# EAGLE board RangeFinder (EAGLE 9.6.2)
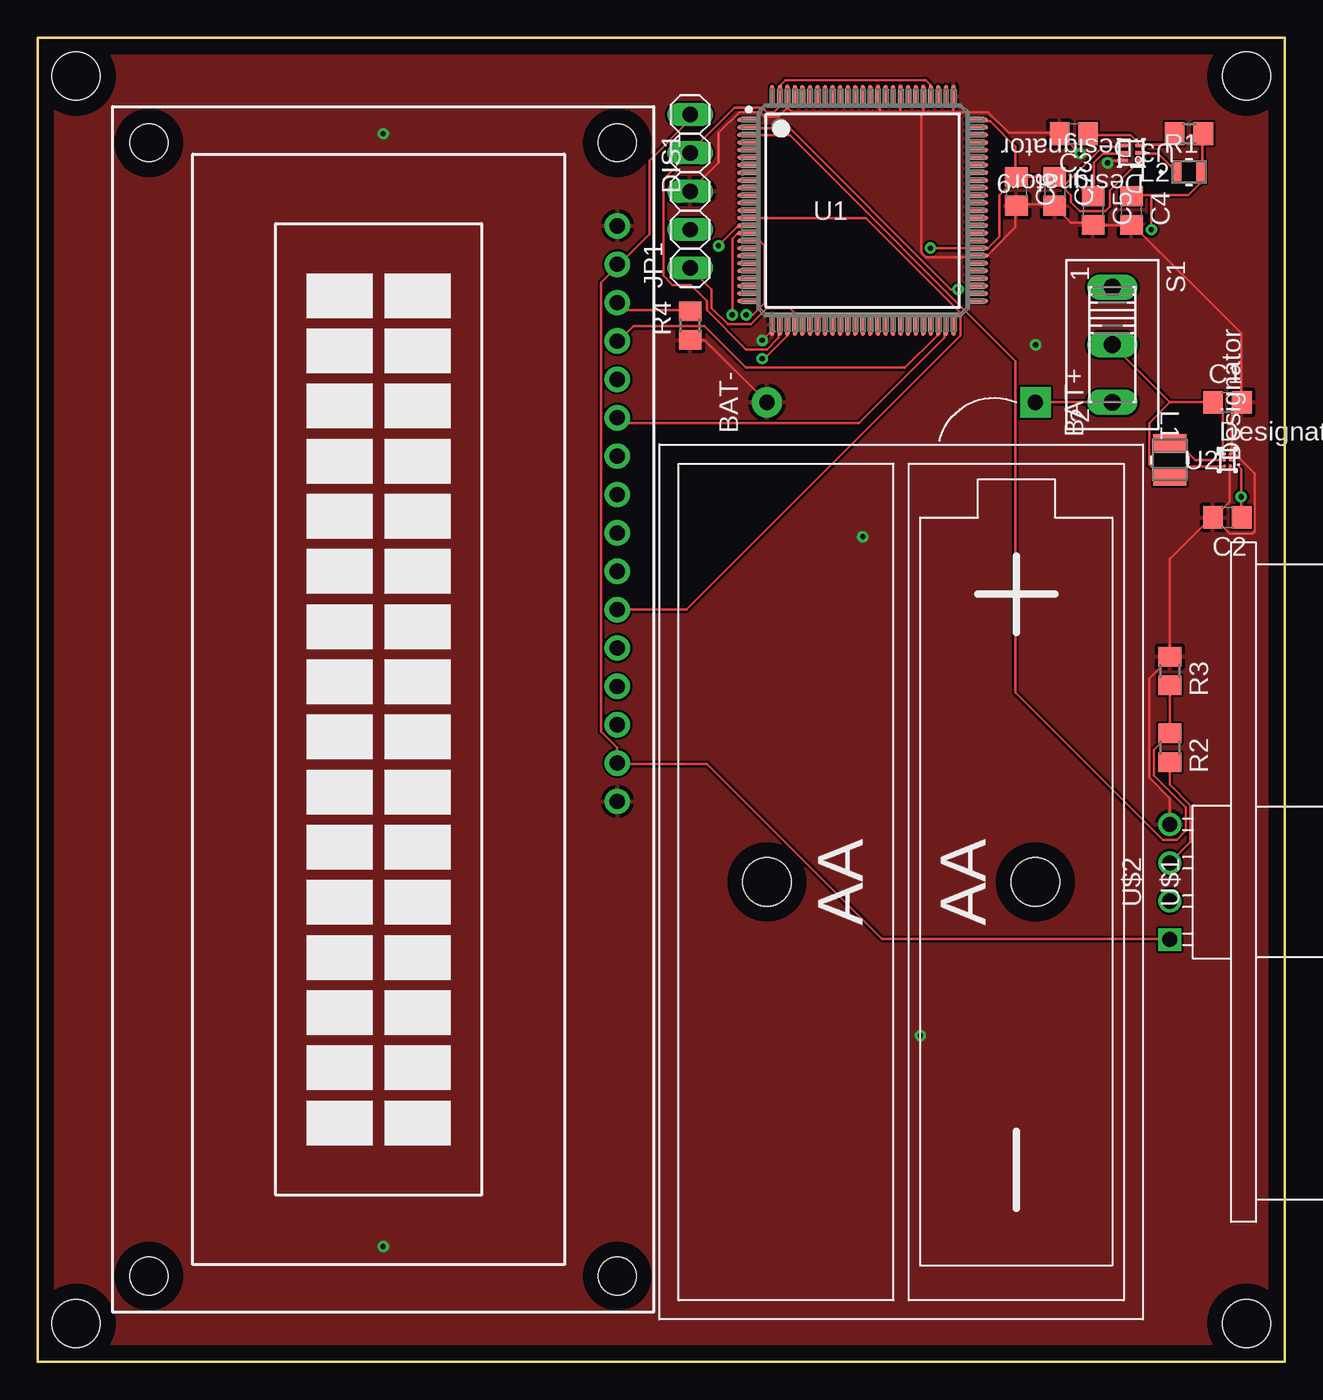
[diagram p0: board, top side]
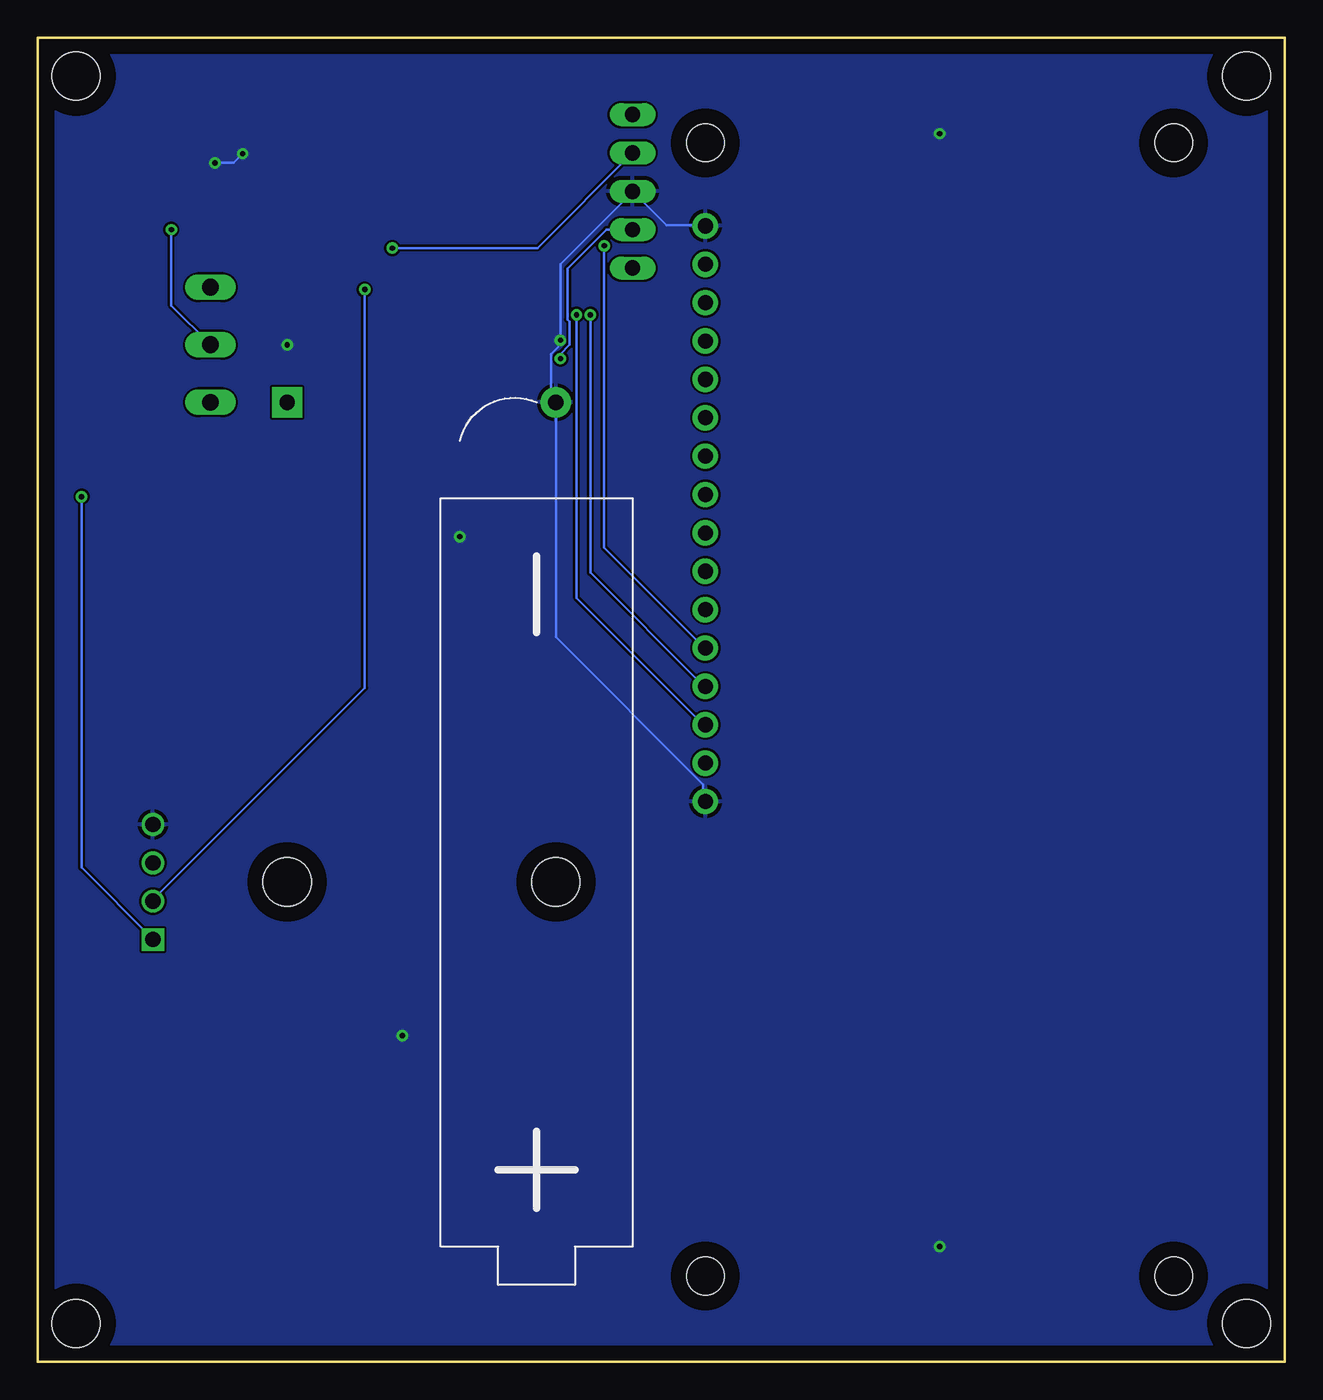
[diagram p1: board, bottom side, seen from below]

Size 82.55 x 87.63 mm. Coordinates in mm from the lower left corner, seen from the top.
Outline: 0,0 0,87.63 82.55,87.63 82.55,0 0,0
Copper layers (1*16): Top 0.035mm / dielectric 1.5mm / Bottom 0.035mm
Design rules "default": minimum track width 6mil, minimum drill 0.35mm, track to track 6mil, track to pad 6mil, pad to pad 6mil, via to via 6mil, smd to smd 6mil, copper to edge 40mil, drill to drill 6mil, minimum pad ring 10mil, minimum via ring 8mil, stop-mask expansion 4mil, vias tented up to drill 0mil, thermal gap 10mil
Holes 3.17 mm at 2.54,85.09 2.54,2.54 80.01,2.54 80.01,85.09

## Footprints (pad centres in the part's own frame; a part is rotated, then mirrored left to right if it is on the bottom)
C0805 = smd 1.3 x 1.5: 1 -0.95,0; 2 0.95,0
TUXGR_16X2_R2 = drill 1 pad 1.676: 1 -32,15.5; 2 -29.46,15.5; 3 -26.92,15.5; 4 -24.38,15.5; 5 -21.84,15.5; 6 -19.3,15.5; 7 -16.76,15.5; 8 -14.22,15.5; 9 -11.68,15.5; 10 -9.14,15.5; 11 -6.6,15.5; 12 -4.06,15.5; 13 -1.52,15.5; 14 1.02,15.5; 15 3.56,15.5; 16 6.1,15.5 | hole 2.5: -37.5,-15.5; 37.5,-15.5; -37.5,15.5; 37.5,15.5
1X05 = drill 1.016 long: 1 -5.08,0; 2 -2.54,0; 3 0,0; 4 2.54,0; 5 5.08,0
IND_LQM2HPN2R2MG0L_MUR = smd 1.168 x 2.21: 1 -1.118,0; 2 1.118,0
IND_TAIYO_CBC2012_TAY = smd 0.61 x 1.448: 1 -0.8,0; 2 0.8,0
R0805 = smd 1.3 x 1.5: 1 -0.95,0; 2 0.95,0
255SB = drill 1.118 long: 1 -3.81,0; 2 0,0; 3 3.81,0
PZ0100A_L = smd 1.5 x 0.25: 1 -7.55,6; 2 -7.55,5.5; 3 -7.55,5; 4 -7.55,4.5; 5 -7.55,4; 6 -7.55,3.5; 7 -7.55,3; 8 -7.55,2.5; 9 -7.55,2; 10 -7.55,1.5; 11 -7.55,1; 12 -7.55,0.5; 13 -7.55,0; 14 -7.55,-0.5; 15 -7.55,-1; 16 -7.55,-1.5; 17 -7.55,-2; 18 -7.55,-2.5; 19 -7.55,-3; 20 -7.55,-3.5; 21 -7.55,-4; 22 -7.55,-4.5; 23 -7.55,-5; 24 -7.55,-5.5; 25 -7.55,-6; 51 7.55,-6; 52 7.55,-5.5; 53 7.55,-5; 54 7.55,-4.5; 55 7.55,-4; 56 7.55,-3.5; 57 7.55,-3; 58 7.55,-2.5; 59 7.55,-2; 60 7.55,-1.5; 61 7.55,-1; 62 7.55,-0.5; 63 7.55,0; 64 7.55,0.5; 65 7.55,1; 66 7.55,1.5; 67 7.55,2; 68 7.55,2.5; 69 7.55,3; 70 7.55,3.5; 71 7.55,4; 72 7.55,4.5; 73 7.55,5; 74 7.55,5.5; 75 7.55,6 | smd 0.25 x 1.5: 26 -6,-7.55; 27 -5.5,-7.55; 28 -5,-7.55; 29 -4.5,-7.55; 30 -4,-7.55; 31 -3.5,-7.55; 32 -3,-7.55; 33 -2.5,-7.55; 34 -2,-7.55; 35 -1.5,-7.55; 36 -1,-7.55; 37 -0.5,-7.55; 38 0,-7.55; 39 0.5,-7.55; 40 1,-7.55; 41 1.5,-7.55; 42 2,-7.55; 43 2.5,-7.55; 44 3,-7.55; 45 3.5,-7.55; 46 4,-7.55; 47 4.5,-7.55; 48 5,-7.55; 49 5.5,-7.55; 50 6,-7.55; 76 6,7.55; 77 5.5,7.55; 78 5,7.55; 79 4.5,7.55; 80 4,7.55; 81 3.5,7.55; 82 3,7.55; 83 2.5,7.55; 84 2,7.55; 85 1.5,7.55; 86 1,7.55; 87 0.5,7.55; 88 0,7.55; 89 -0.5,7.55; 90 -1,7.55; 91 -1.5,7.55; 92 -2,7.55; 93 -2.5,7.55; 94 -3,7.55; 95 -3.5,7.55; 96 -4,7.55; 97 -4.5,7.55; 98 -5,7.55; 99 -5.5,7.55; 100 -6,7.55
YFF0006AFAD = smd 0.23 x 0.23: 1 -0.2,0.4; 2 0.2,0.4; 3 -0.2,0; 4 0.2,0; 5 -0.2,-0.4; 6 0.2,-0.4
DSE0006A = smd 0.66 x 0.25: 1 -0.62,0.5 | smd 0.7 x 0.25: 2 -0.6,0; 3 -0.6,-0.5; 4 0.6,-0.5; 5 0.6,0; 6 0.6,0.5
BATTERY-HOLDER-2AA = drill 1 pad 2 square: BAT+ -31.75,8.89 | drill 1 pad 2: BAT- -31.75,-8.89 | hole 3.2: 0,8.89; 0,-8.89
ULTRASONIC-HC-SR04#V = drill 1 square: 1 -3.81,0 | drill 1: 2 -1.27,0; 3 1.27,0; 4 3.81,0

## Placement (x,y rotation side)
C1  10 uF  [C0805]  78.74,63.5 0 top
C2  10 uF  [C0805]  78.74,55.88 180 top
C3  100 uF  [C0805]  68.58,81.28 180 top
C4  10 uF  [C0805]  72.39,76.2 270 top
C5  1 uF  [C0805]  69.85,76.2 270 top
C6  4.7 uF  [C0805]  64.77,77.47 270 top
C7  4.7 uF  [C0805]  67.31,77.47 270 top
DIS1  TUXGR_16X2_R2  [TUXGR_16X2_R2]  22.86,43.18 270 top
JP1  [1X05]  43.18,77.47 90 top
L1  LQM2HPN2R2MG0L  [IND_LQM2HPN2R2MG0L_MUR]  74.93,59.69 270 top
L2  CBC2012T2R2M  [IND_TAIYO_CBC2012_TAY]  76.2,78.74 0 top
R1  390 mOhm  [R0805]  76.2,81.28 180 top
R2  1 KOhm  [R0805]  74.93,40.64 270 top
R3  2 KOhm  [R0805]  74.93,45.72 270 top
R4  3.5 KOhm  [R0805]  43.18,68.58 90 top
S1  [255SB]  71.12,67.31 270 top
U1  Value  [PZ0100A_L]  54.61,76.2 0 top
U2  Value  [YFF0006AFAD]  78.74,59.69 0 top
U3  Value  [DSE0006A]  72.39,80.01 180 top
U$1  BATTERY-HOLDER-2AA  [BATTERY-HOLDER-2AA]  57.15,31.75 270 top
U$2  ULTRASONIC-HC-SR04#V  [ULTRASONIC-HC-SR04#V]  74.93,31.75 90 top

## Library data of the parts
C1 C2 C4 C6 C7 = rcl; MF: TAIYO YUDEN; MPN: TMK212BBJ106MG-T; OC_NEWARK: 08AH2212; SPICEPREFIX: C
C3 = rcl; MF: TAIYO YUDEN; MPN: PMK212BBJ107MG-T.; OC_NEWARK: 29AC9540; SPICEPREFIX: C
C5 = rcl; MF: MULTICOMP PRO; MPN: MC0805F105Z500CT; OC_NEWARK: 06R3936; SPICEPREFIX: C
DIS1 = display-lcd; MF: MIDAS; MPN: MC21605C6W-BNMLW-V2; OC_FARNELL: unknown; OC_NEWARK: 03AC3426
JP1 = pinhead; MF: MULTICOMP PRO; MPN: 2211S-05G; OC_NEWARK: 08N6747
L1 = JD-RangeFinder; BUILT_BY: EMA_Cory; COPYRIGHT: Copyright (C) 2018 Accelerated Designs. All rights reserved; DATASHEET: https://search.murata.co.jp/Ceramy/image/img/P02/JELF243B-0019.pdf; MANUFACTURER_PART_NUMBER: LQM2HPN2R2MG0L; MF: MURATA; MPN: LQM2HPN2R2MG0L; OC_NEWARK: 45Y5436; SOURCELIBRARY: Murata_2020-08-06; VENDOR: Murata
L2 = JD-RangeFinder; BUILT_BY: EMA_UL_Team; MANUFACTURER_PART_NUMBER: CBC2012T2R2M; MF: TAIYO YUDEN; MPN: CBC2012T2R2M.; OC_NEWARK: 29AC3034; SOURCELIBRARY: TaiyoYuden_2011-01-01_IND_CB; VENDOR: TAIYO YUDEN
R1 = rcl; MF: PANASONIC; MPN: ERJ-6DQJR39V; OC_NEWARK: 68AC0178; SPICEPREFIX: R
R2 = rcl; MF: MULTICOMP PRO; MPN: MCPWR05FTEW1001; OC_NEWARK: 43T5414; SPICEPREFIX: R
R3 = rcl; MF: PANASONIC; MPN: ERA-6AEB202V; OC_NEWARK: 40P0008; SPICEPREFIX: R
R4 = rcl; MF: TT ELECTRONICS / WELWYN; MPN: PCF0805R-3K57BT1; OC_NEWARK: 50M4615; SPICEPREFIX: R
S1 = switch; MF: E-SWITCH; MPN: EG1218; OC_NEWARK: 15N7301
U1 = JD-RangeFinder; ALTERNATE_PARTNUMBER: MSP430FR6989IPZ; COMPTYPE: IC; MANUFACTURER: Texas Instruments; MF: TEXAS INSTRUMENTS; MOUNTTYPE: SMT; MPN: MSP432P401RIPZR; OC_NEWARK: 28AH4232; PACKAGEREFERENCE: PZ0100A; PARTNUMBER: MSP430FR6989IPZR; PIN_COUNT: 100; REFDES: RefDes; ROHS: Y; TYPE: TYPE
U2 = JD-RangeFinder; MANUFACTURER: Texas Instruments; MANUFACTURER_NAME: Texas Instruments; MANUFACTURER_PART_NUMBER: TPS610997YFFR; OC_NEWARK: unknown; PARTNUMBER: TPS610997YFFR; REFDES: RefDes; TYPE: TYPE
U3 = JD-RangeFinder; ALTERNATEPARTNUMBER: TPS610981DSET; APPLICATION_BUILDNUMBER: *; COMPTYPE: IC; MANUFACTURER: Texas Instruments; MANUFACTURER_NAME: Texas Instruments; MANUFACTURER_PART_NUMBER: TPS610981DSER; MOUNTTYPE: SMT; OC_NEWARK: unknown; PACKAGEREFERENCE: DSE0006A; PARTNUMBER: TPS610981DSER; PIN_COUNT: 6; REFDES: RefDes; ROHS: Y; TYPE: TYPE
U$1 = diy-modules; MF: KEYSTONE; MPN: 2462; OC_NEWARK: 16F1091
U$2 = diy-modules; MF: MCM; MPN: 83-17989; OC_NEWARK: 32AC9980

## Nets
GND: C1.2 C2.2 C3.2 C4.2 C5.2 C6.2 C7.2 DIS1.1 DIS1.16 JP1.3 R3.1 R4.1 U1.26 U1.57 U1.76 U1.80 U1.83 U1.86 U1.98 U2.2 U2.6 U3.6 U$1.BAT- U$2.4
N$1: C3.1 R1.2 U3.3
N$2: S1.3 U$1.BAT+
N$3: C5.1 U3.5
N$4: C1.1 C4.1 L1.2 L2.2 R1.1 S1.2 U2.1 U2.5
N$5: C6.1 C7.1 JP1.4 U1.27 U1.58 U1.75 U1.79 U1.99 U3.1 U3.4
N$6: JP1.1 U1.29
N$7: L2.1 U3.2
N$8: JP1.2 U1.28
N$9: R2.1 R3.2 U1.3
N$10: L1.1 U2.3
N$12: R2.2 U$2.3
N$13: DIS1.3 R4.2
N$14: U1.2 U$2.2
N$15: DIS1.11 U1.14
N$16: DIS1.12 U1.15
N$17: DIS1.13 U1.16
N$18: DIS1.14 U1.17
N$19: DIS1.6 U1.49
N$20: DIS1.4 U1.48
N$21: C2.1 DIS1.2 DIS1.15 JP1.5 U2.4 U$2.1
N$22: DIS1.5

## Tracks (layer width: path | path; a pad name or v marks a point on that pad's centre or on a via)
GND  (via drill 0.35)
  Top 0.152: U$1.BAT- 44.15,67.62 43.23,67.62 R4.1 | v47.95,67.62 48.56,68.22 48.56,68.53 U1.26 | 79.04,60.15 79.04,62.89 79.65,63.5 | 77.83,55.88 78.89,56.95 78.89,59.23 U2.6 | 79.04,60.15 79.2,60.15 80.57,58.78 80.57,54.97 80.42,54.81 78.89,54.81 77.83,55.88 | 79.04,60.15 U2.2 | 77.83,55.88 C2.2 77.67,55.88 74.93,53.14 R3.1 74.93,46.58 73.56,45.21 73.56,38.66 74.93,37.29 U$2.4 | v70.81,79.35 70.97,79.5 71.73,79.5 U3.6 | v68.99,79.96 67.77,81.18 C3.2 67.62,81.33 64.26,81.33 62.89,82.7 60.6,82.7 | 49.63,83.01 49.63,83.62 U1.98 49.63,83.01 | 49.63,83.01 49.02,82.4 48.11,82.4 47.8,82.7 46.43,82.7 45.06,81.33 45.06,79.35 JP1.3 | 55.73,82.7 49.94,82.7 49.63,83.01 | 55.73,82.7 57.1,82.7 | 57.1,82.7 58.47,82.7 | 58.47,82.7 58.62,82.7 | 58.62,82.7 60.6,82.7 | 58.47,82.7 58.47,73.41 58.78,73.1 62.13,73.1 U1.57 62.28,73.25 62.89,73.25 64.72,75.08 64.72,76.45 C6.2 64.87,76.61 67.31,76.61 C7.2 67.31,76.45 68.38,75.39 69.75,75.39 C5.2 69.9,75.23 72.34,75.23 C4.2 72.49,75.23 79.65,68.07 79.65,63.5 | 79.65,63.5 C1.2 | 55.73,82.7 55.73,83.62 U1.86 | 57.1,82.7 57.1,83.62 U1.83 | 58.62,82.7 58.62,83.62 U1.80 | 60.6,82.7 60.6,83.62 U1.76
  Bottom 0.152: DIS1.16 38.51,37.13 38.51,38.2 48.26,47.95 U$1.BAT- 48.56,63.8 48.56,66.7 47.95,67.31 v47.95,67.62 47.95,72.64 43.23,77.37 JP1.3 40.94,75.23 38.51,75.23 DIS1.1 | v70.81,79.35 69.6,79.35 v68.99,79.96
  other vias: 22.86,7.62 22.86,81.28 54.61,54.61 58.42,21.59 66.04,67.31
  pour Top (isolate 0): -6.35,96.52 92.71,96.52 92.71,-10.16 -6.35,-10.16
  pour Bottom (isolate 0): -5.08,95.25 91.44,95.25 91.44,-8.89 -5.08,-8.89
N$1
  Top 0.152: R1.2 75.23,81.18 74.62,80.57 73.1,80.57 U3.3 72.95,80.57 72.34,81.18 69.6,81.18 C3.1
N$2
  Top 0.152: U$1.BAT+ S1.3
N$3
  Top 0.152: U3.5 71.73,79.96 70.51,79.96 69.9,79.35 69.9,77.22 C5.1
N$4  (via drill 0.35)
  Top 0.152: R1.1 77.06,81.18 77.06,78.74 L2.2 76.91,78.74 76.91,77.98 76.15,77.22 73.71,77.22 | 73.71,77.22 72.49,77.22 C4.1 | 74.93,58.62 75.54,58.62 76.15,59.23 78.44,59.23 U2.5 | U2.1 78.44,60.15 78.44,62.89 77.83,63.5 C1.1 74.93,63.5 | S1.2 74.93,63.5 | 74.93,58.62 74.32,58.62 73.56,59.38 73.56,62.13 74.93,63.5 | 74.93,58.62 L1.2 | v73.71,74.93 73.71,77.22
  Bottom 0.152: v73.71,74.93 73.71,69.9 S1.2
N$5  (via drill 0.35)
  Top 0.152: C6.1 64.72,78.28 63.65,77.22 63.65,74.47 62.89,73.71 62.28,73.71 U1.58 62.13,73.71 v59.08,73.71 | 67.77,77.83 67.31,78.28 C7.1 | 67.77,77.83 68.38,77.22 68.38,76.76 68.99,76.15 70.66,76.15 70.97,76.45 70.97,77.52 72.95,79.5 U3.1 | 67.77,77.83 67.92,77.83 70.51,80.42 71.73,80.42 U3.4 | 67.77,77.83 C7.1 | C6.1 64.87,78.44 67.31,78.44 C7.1 | U1.27 49.02,68.53 49.02,67.77 48.26,67.01 46.89,67.01 44.3,69.6 44.3,70.21 43.23,71.27 42.01,71.27 41.4,71.88 41.4,78.28 43.08,79.96 JP1.4 43.23,80.11 46.13,83.01 47.95,83.01 48.26,82.7 48.72,82.7 49.02,83.01 49.02,83.62 U1.99 49.17,83.77 49.17,84.53 49.48,84.84 58.78,84.84 59.08,84.53 59.08,83.77 U1.79 | U1.75 62.28,82.09 63.04,82.09 64.72,80.42 64.72,78.44 C6.1
  Bottom 0.152: v59.08,73.71 49.48,73.71 JP1.4
N$6
  Top 0.152: JP1.1 44.6,70.97 44.6,69.75 45.67,68.68 47.19,68.68 48.26,69.75 49.78,69.75 50.09,69.44 50.09,68.68 U1.29
N$7
  Top 0.152: U3.2 73.1,79.96 74.17,79.96 75.39,78.74 L2.1
N$8  (via drill 0.35)
  Top 0.152: v47.95,66.4 48.11,66.4 49.63,67.92 49.63,68.53 U1.28
  Bottom 0.152: v47.95,66.4 47.95,66.7 47.35,67.31 47.35,68.83 47.5,68.99 47.5,72.34 44.91,74.93 JP1.2
N$9
  Top 0.152: R3.2 R2.1 74.93,41.55 73.86,40.49 73.86,38.81 76,36.68 76,35.15 75.39,34.54 74.47,34.54 64.72,44.3 64.72,66.24 49.78,81.18 47.19,81.18 U1.3
N$10
  Top 0.152: U2.3 78.44,59.69 76.61,59.69 75.54,60.76 74.93,60.76 L1.1
N$12
  Top 0.152: R2.2 74.93,38.2 76.3,36.83 76.3,34.39 U$2.3
N$13
  Top 0.152: R4.2 43.08,69.6 38.96,69.6 38.51,70.05 DIS1.3
N$14  (via drill 0.35)
  Top 0.152: v60.91,70.97 60.45,70.97 49.78,81.64 47.19,81.64 U1.2
  Bottom 0.152: v60.91,70.97 60.91,44.6 74.93,30.58 U$2.2
N$15
  Top 0.152: U1.14 47.19,75.69 54.81,75.69 61.06,69.44 61.06,67.92 42.93,49.78 38.51,49.78 DIS1.11
N$16  (via drill 0.35)
  Top 0.152: v45.06,73.86 46.28,75.08 47.04,75.08 U1.15
  Bottom 0.152: v45.06,73.86 45.06,53.9 38.51,47.35 DIS1.12
N$17  (via drill 0.35)
  Top 0.152: v45.97,69.29 45.97,74.32 46.28,74.62 47.04,74.62 U1.16
  Bottom 0.152: v45.97,69.29 45.97,52.22 38.51,44.76 DIS1.13
N$18  (via drill 0.35)
  Top 0.152: v46.89,69.29 47.35,69.29 48.11,70.05 48.11,73.86 47.8,74.17 47.19,74.17 U1.17
  Bottom 0.152: v46.89,69.29 46.89,50.55 38.51,42.16 DIS1.14
N$19
  Top 0.152: U1.49 60,68.53 60,67.77 54.36,62.13 38.81,62.13 38.51,62.43 DIS1.6
N$20
  Top 0.152: U1.48 59.54,68.53 59.54,67.92 57.4,65.79 46.89,65.79 44.15,68.53 39.42,68.53 38.51,67.62 DIS1.4
N$21  (via drill 0.35)
  Top 0.152: U2.4 79.04,59.69 79.65,59.08 v79.65,57.25 79.65,55.88 C2.1 | JP1.5 43.08,82.55 43.08,82.09 40.49,79.5 40.49,74.62 38.51,72.64 DIS1.2 38.35,72.49 37.29,71.43 37.29,41.71 38.35,40.64 38.35,39.73 DIS1.15 38.51,39.57 44.3,39.57 55.88,27.99 74.93,27.99 U$2.1
  Bottom 0.152: v79.65,57.25 79.65,32.72 74.93,27.99 U$2.1